# Altium PCB bt.PcbDoc
Units mm, origin at the board's own origin, x right, y up, seen from the top; angles counter-clockwise.
Board outline 40 x 20 mm, 2 copper layers (Top Layer, Bottom Layer); 33 components, 23 nets, 113 pads, 32 vias.
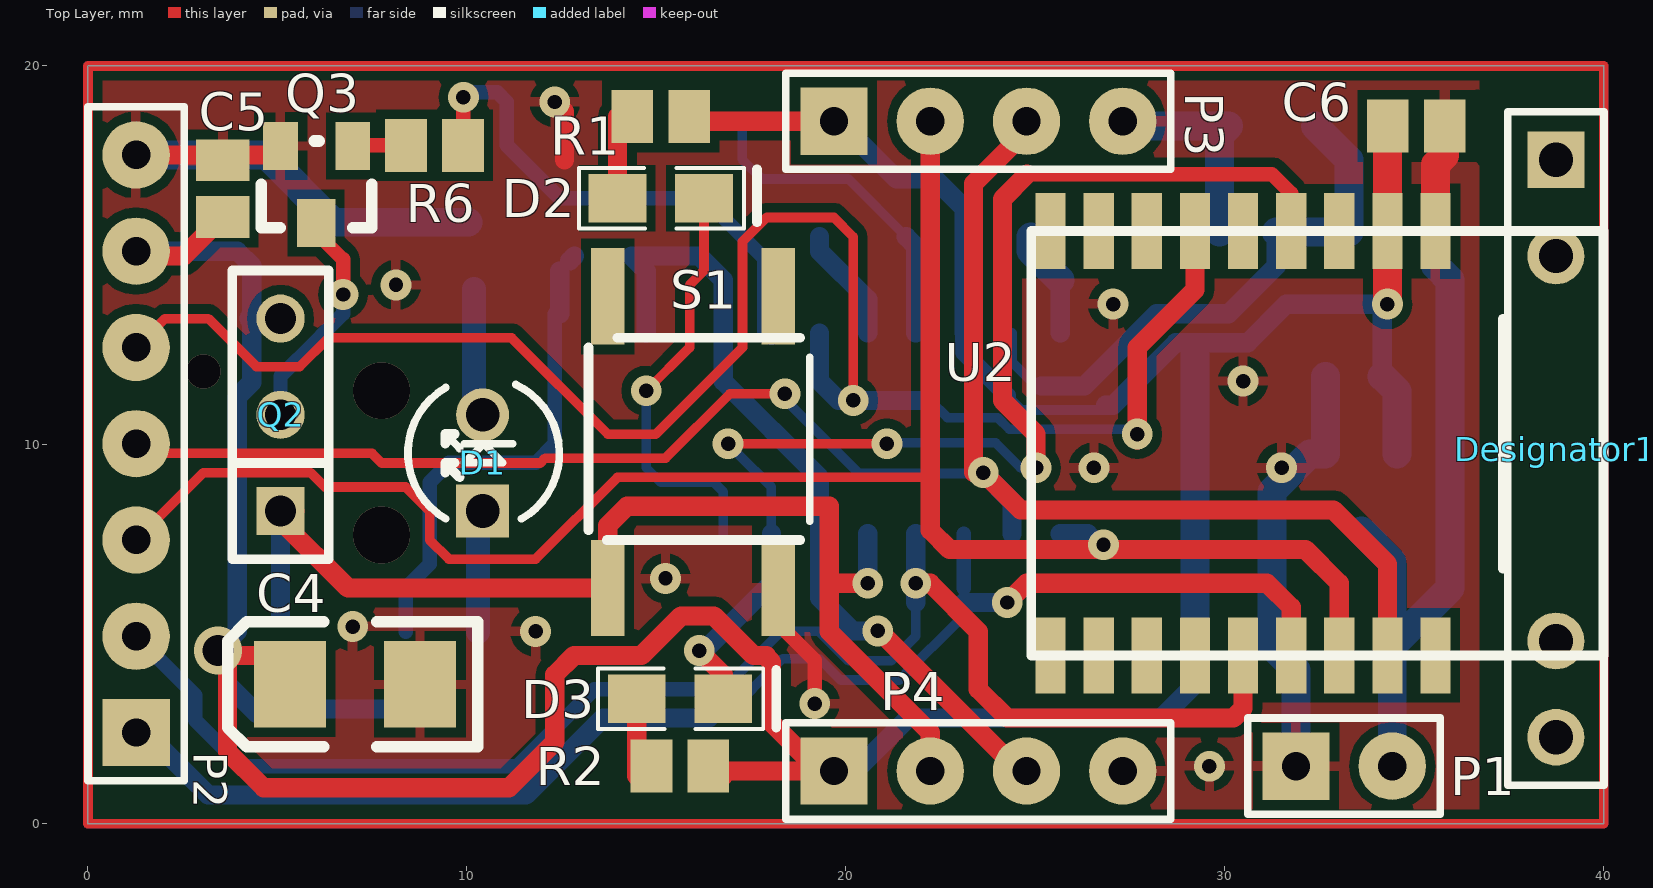
[diagram p0: Top Layer view]
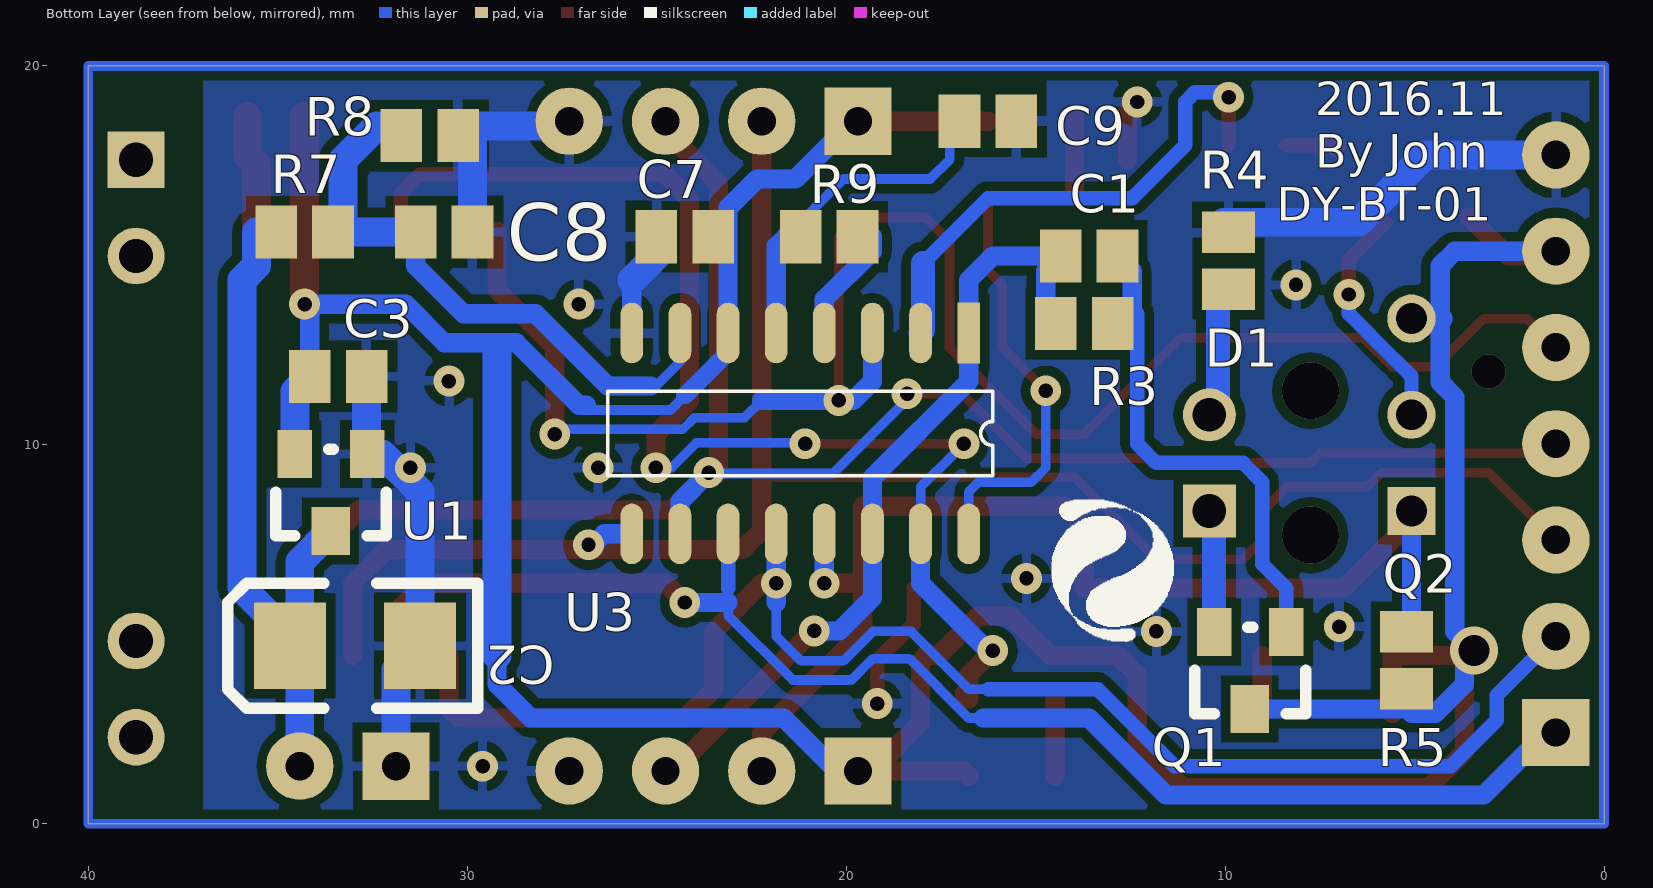
[diagram p1: Bottom Layer view, seen from below]

## Layer stack, top to bottom
Top Solder: solder mask 0.0102, Solder Resist, Dk 3.5
Top Layer: signal copper 0.0356
Dielectric 1: dielectric 0.32, FR-4, Dk 4.8
Bottom Layer: signal copper 0.0356
Bottom Solder: solder mask 0.0102, Solder Resist, Dk 3.5

## Board outline
0,0 40,0 40,20 0,20

## Design rules (kind name [scope] priority, off if disabled: settings)
Clearance [All] p1: gap=0.254
PolygonConnect [All] p1: connectstyle=Relief reliefconductorwidth=0.254 reliefentries=4 polygonreliefangle="90 Angle" airgapwidth=0.254
RoutingVias [All] p1: holewidth=0.381 width=0.813 viastyle="Through Hole" minholewidth=0.254 minwidth=0.762 maxholewidth=0.711 maxwidth=1.27
SolderMaskExpansion [All] p1: expansion=0.102
Width [All] p1: maxlimit=2.54 minlimit=0.254 preferedwidth=0.508 minimp=50.000000 maximp=50.000000 favimp=50.000000
29 further rules are at their usual default settings.

## Components (designator, comment, footprint, x,y, rotation, side; value= is the part's Value field where it differs from the comment)
C1 "Cap Semi" C0805#1 13.589,14.986 r180 bottom
C2 "Cap Pol1" 3528 34.671,4.699 r0 bottom
C3 "Cap Semi" C0805#1 33.401,11.811 r0 bottom
C4 "Cap Pol1" 3528 5.334,3.683 r180 top
C5 "Cap Semi" C0805#1 3.556,16.764 r270 top
C6 "Cap Semi" C0805#1 35.052,18.415 r180 top
C7 "Cap Semi" C0805#1 24.257,15.494 r0 bottom
C8 "Cap Semi" C0805#1 30.607,15.621 r0 bottom
C9 "Cap Semi" C0805#1 16.256,18.542 r180 bottom
D1 "LED0" LED1 10.414,8.255 r90 top locked
D2 "LED0" 0805 13.97,16.51 r0 top
D3 "LED0" 0805 14.478,3.302 r0 top
Designator1 "Comment" HDR1X7#1 38.735,17.526 r270 top
P1 "Header 2" HDR1X2 31.877,1.524 r0 top
P2 "Header 7" HDR1X7#2 1.27,2.413 r90 top
P3 "Header 4" HDR1X4 19.685,18.542 r0 top
P4 "Header 4" HDR1X4 19.685,1.397 r0 top
Q1 "2301" "SOT-23 - LDO" 9.398,3.048 r0 bottom
Q2 "Photo NPN" SIP3 5.08,8.255 r90 top locked
Q3 "2302" "SOT-23 - LDO" 5.969,15.875 r180 top
R1 "Res2" C0805#2 15.113,18.669 r0 top
R2 "Res2" C0805#2 15.621,1.524 r0 top
R3 "Res2" C0805#1 13.716,13.208 r0 bottom
R4 "Res2" C0805#1 9.906,14.859 r270 bottom
R5 "Res2" C0805#1 5.207,4.318 r90 bottom
R6 "Res2" C0805#1 9.144,17.907 r0 top
R7 "Res2" C0805#1 34.29,15.621 r0 bottom
R8 "Res2" C0805#1 30.988,18.161 r180 bottom
R9 "Res2" C0805#1 20.447,15.494 r180 bottom
S1 "SW-PB" KEY4 13.716,6.223 r90 top
U1 "XC6206P302PR" "SOT-23 - LDO" 33.655,7.747 r0 bottom
U2 "BLE 4.0" BLE4.0 25.4,15.621 r270 top
U3 "STC15W201S_SOP16_DIP16" SOP16 16.764,12.954 r270 bottom

## Footprints (in the part's own frame and the unit in brackets; to place one, negate y for a bottom-side part, rotate by r counter-clockwise, add the part's x,y. Pads: shape width x height; smd on the part's side, far side on the other; paste and mask are expansions set on the pad)
0805 [mil]
  rect 60x50 smd: 1(0,0) 2(90,0)
  silkscreen extent -40,-31 131,31
3528 [mil]
  rect 75x90 smd: 1(0,0) 2(-135,0)
  silkscreen extent -195,-65 65,65
BLE4.0 [mm]
  rect 2x0.8 smd: 1(-0.024,10.16) 2(-0.024,8.89) 3(-0.024,7.62) 4(-0.024,6.35) 5(-0.024,5.08) 6(-0.024,3.81) 7(-0.024,2.54) 8(-0.024,1.27) 9(-0.024,0) 10(11.176,0) 11(11.176,1.27) 12(11.176,2.54) 13(11.176,3.81) 14(11.176,5.08) 15(11.176,6.35) 16(11.176,7.62) 17(11.176,8.89) 18(11.176,10.16)
  silkscreen extent -0.02,-0.51 11.18,14.59
C0805#1 [mm] "Chip Capacitor, Body 2.0x1.3mm, IPC High Density"
  rect 1.1x1.4 smd: 1(-0.75,0) 2(0.75,0)
  body extent -1.1,-0.72 1.1,0.72, height 1.4
C0805#2 [mm] "Chip Capacitor, Body 2.0x1.3mm, IPC High Density"
  rect 1.1x1.4 smd: 1(0.75,0) 2(-0.75,0)
  body extent -1.1,-0.72 1.1,0.72, height 1.4
HDR1X2 [mil] "Connector; Header; 2 Position"
  rect 70x70 hole 29.53: 1(0,0)
  round 70 hole 29.53: 2(100,0)
  silkscreen extent -50,-50 150,50
HDR1X4 [mil] "Connector; Header; 4 Position"
  rect 70x70 hole 29.53: 1(0,0)
  round 70 hole 29.53: 2(100,0) 3(200,0) 4(300,0)
  silkscreen extent -50,-50 350,50
HDR1X7#1 [mm] "Connector; Header; 7 Position"
  rect 1.5x1.5 hole 0.9: 1(0,0)
  round 1.5 hole 0.9: 2(2.54,0) 6(12.7,0) 7(15.24,0)
  silkscreen extent -1.27,-1.27 16.51,1.27
HDR1X7#2 [mm] "Connector; Header; 7 Position"
  rect 1.778x1.778 hole 0.75: 1(0,0)
  round 1.778 hole 0.75: 2(2.54,0) 3(5.08,0) 4(7.62,0) 5(10.16,0) 6(12.7,0) 7(15.24,0)
  silkscreen extent -1.27,-1.27 16.51,1.27
KEY4 [mm]
  rect 2.54x0.889 smd: 1(0,-4.5) 2(7.7,-4.5) 3(0,0) 4(7.7,0)
  silkscreen extent 1.27,-5.33 6.6,0.51
LED1 [mil]
  rect 55x55 hole 35: 1(0,0)
  round 55 hole 35: 2(100,0)
  silkscreen extent -8,-80 131,78
SIP3 [mil]
  rect 50x50 hole 32: 1(0,0)
  round 50 hole 32: 2(100,0) 3(200,0)
  silkscreen extent -50,-50 250,50
SOP16 [mm]
  rect 1.6x0.6 smd: 1(0,0)
  oval 1.6x0.6 smd: 2(0,-1.27) 3(0,-2.54) 4(0,-3.81) 5(0,-5.08) 6(0,-6.35) 7(0,-7.62) 8(0,-8.89) 9(5.3,-8.89) 10(5.3,-7.62) 11(5.3,-6.35) 12(5.3,-5.08) 13(5.3,-3.81) 14(5.3,-2.54) 15(5.3,-1.27) 16(5.3,0)
  silkscreen extent 1.53,-9.53 3.77,0.63
"SOT-23 - LDO" [mil]
  rect 36x50 smd: 1(-39.97,-79.46) 2(35.03,-79.46)
  rect 40x50 smd: 3(-1.97,0.54)
  silkscreen extent -60,-84 55,6

## Part data
C1 C3 C5 C6 C7 C8 C9: "Capacitor (Semiconductor SIM Model)"
C2 C4: "Polarized Capacitor (Radial)"
D1 D2 D3: "Typical INFRARED GaAs LED"
P1: "Header, 2-Pin"
P2: "Header, 7-Pin"
P3 P4: "Header, 4-Pin"
Q1: library part MOSFET-P, "P-Channel MOSFET"
Q2: "NPN Phototransistor"
Q3: library part MOSFET-N, "N-Channel MOSFET"
R1 R2 R3 R4 R5 R6 R7 R8 R9: "Resistor"
S1: "Switch"
U1: library part "Volt Reg", "Voltage Regulator"

## Via types
v1: diameter 0.813, hole 0.381, Top Layer to Bottom Layer, 28 vias
v2: diameter 1.5, hole 1.5, Top Layer to Bottom Layer, 2 vias
v3: diameter 0.9, hole 0.9, Top Layer to Bottom Layer, 1 vias
v4: diameter 1.27, hole 0.813, Top Layer to Bottom Layer, 1 vias

## Nets (pads, with @x,y where several pads share a name; then routed paths per layer and width w, separated by ;. In a path a pad name is that pad's centre, name@x,y a point inside that pad or via, vN(x,y) a via of type N, cw(c..) or ccw(c..) an arc to the next point about the centre after c; other vN are vias at no path point)
GND: C2.2 C3.1 C4.2 C5.1 C6.1 C7.2 C8.1 C9.2 P1.1 P2.7 P3.4 P4.4 Q3.2 R4.1 R8.2 S1.1 U1.1 U2.1 U3.8 | length 42.4
  Top Layer w0.254: v1(12.319,19.05) v1@12.573,18.796
  Top Layer w0.381: S1.1 18.216,5.279 19.177,4.318 v1(19.177,3.175)
  Top Layer w0.508: P2.7@1.524,17.653 Q3.2@4.699,17.653 ; C4.2@9.017,2.933 C4.2@9.017,4.445 ; 12.573,17.526 v1@12.573,18.796
  Top Layer w0.762: U2.1 35.56,17.399 35.802,17.641 C6.1@35.802,18.669
  Bottom Layer w0.508: U3.8 25.654,14.351
  Bottom Layer w0.762: P2.7 4.699,17.653 6.477,15.875 R4.1@10.033,15.875 ; C7.2@24.88,15.494 24.88,15.125 25.654,14.351 ; P3.4@27.305,18.669 27.559,18.415 30.099,18.415 29.857,18.173 C8.1 ; P1.1 31.877,4.064 C2.2 31.242,8.763 32.244,9.765 U1.1 32.651,9.776 C3.1
  other v1: 29.591,1.524 11.811,5.08 6.985,5.207 15.24,6.477 26.543,9.398 31.496,9.398 30.48,11.684 27.051,13.716 8.128,14.224
NetC1_1: C1.1 P4.3 R3.2 U3.1 U3.14 | length 21.8
  Top Layer w0.508: v1(20.84,5.092) 20.828,5.103 20.828,5.145 24.576,1.397 P4.3
  Bottom Layer w0.508: R3.2@14.732,12.954 14.732,14.593 C1.1 16.129,14.986 16.764,14.351 U3.1 16.764,11.684 19.304,9.144 U3.14 19.304,5.969 20.181,5.092 v1(20.84,5.092)
NetC1_2: C1.2 Q1.1 R3.1 | length 12.7
  Bottom Layer w0.381: Q1.1 8.383,6.224 9.017,6.858 9.017,9.017 9.525,9.525 11.811,9.525 12.319,10.033 12.319,13.462
  Bottom Layer w0.508: R3.1@12.446,13.462 C1.2@12.446,14.593 ; C1.2@12.711,14.858 C1.2
NetC2_1: C2.1 P1.2 R7.2 U1.3 | length 18.3
  Bottom Layer w0.762: U1.3 34.417,6.921 C2.1@34.417,4.699 ; P1.2 C2.1@34.417,4.699 ; R7.2@35.56,15.621 35.56,14.732 35.941,14.351 35.941,6.223 C2.1@34.417,4.699
NetC8_2: C8.2 R7.1 R8.1 U3.7 | length 15.3
  Bottom Layer w0.254: U3.7 24.384,12.192 25.082,11.493
  Bottom Layer w0.508: 25.146,11.557 26.289,11.557 28.194,13.462 30.099,13.462 31.357,14.72 C8.2
  Bottom Layer w0.762: C8.2 33.274,15.621 33.274,17.526 32.385,18.415
NetC9_1: C9.1 R9.1 U3.5 | length 8.6
  Bottom Layer w0.254: C9.1@17.26,18.288 17.26,17.538 17.78,17.018 20.066,17.018 R9.1@21.59,15.494
  Bottom Layer w0.508: R9.1@21.59,15.494 21.844,15.24 U3.5
NetD1_1: D1.1 Q1.2 | length 3.2
  Bottom Layer w0.635: Q1.2 10.288,8.129 D1.1
NetD1_2: D1.2 R4.2 | length 3.3
  Bottom Layer w0.635: D1.2@10.187,10.797 R4.2@10.187,14.109
NetD2_1: D2.1 R1.2 | length 2
  Top Layer w0.508: D2.1@13.97,16.637 R1.2@13.97,18.669
NetD2_2: D2.2 U3.16 | length 11.1
  Top Layer w0.254: v1(14.732,11.43) 15.875,12.573 15.875,14.224 16.256,14.605 D2.2
  Bottom Layer w0.254: v1(14.732,11.43) 14.732,9.398 15.113,9.017 16.51,9.017 16.764,8.763 U3.16
NetD3_1: D3.1 R2.2 | length 2
  Top Layer w0.508: R2.2@14.478,1.27 D3.1
NetD3_2: D3.2 U2.4 U3.15 | length 33.1
  Top Layer w0.254: v1(16.891,10.033) v1(21.082,10.033)
  Top Layer w0.381: 24.782,17.145 31.242,17.145 31.75,16.637 U2.4
  Top Layer w0.508: v1(16.129,4.572) 16.764,3.937 D3.2 D3.2@16.891,3.429 ; 24.782,17.145 24.13,16.493 24.13,11.176 25.019,10.287 v1(25.019,9.398)
  Bottom Layer w0.254: v1@17.145,9.779 18.034,8.89 U3.15 ; v1@21.082,10.058 23.948,10.058 24.609,9.398 v1(25.019,9.398)
  Bottom Layer w0.508: v1(16.129,4.572) 16.256,4.572 18.034,6.35 U3.15
NetP2_1: P2.1 U2.15 U3.11 | length 37.2
  Top Layer w0.508: v1(24.257,5.842) 24.765,6.35 31.115,6.35 31.75,5.715 U2.15
  Bottom Layer w0.254: 16.383,2.794 16.764,2.794 18.33,4.36 19.297,4.36 19.86,3.796 21.406,3.796 23.114,5.505 23.114,5.842 23.114,6.223
  Bottom Layer w0.381: 23.114,6.223 U3.11
  Bottom Layer w0.508: P2.1@1.524,2.413 3.175,0.762 11.557,0.762 13.589,2.794 16.383,2.794 ; 23.114,5.842 v1(24.257,5.842)
NetP2_2: P2.2 U2.14 U3.12 | length 39.6
  Top Layer w0.508: v1(21.844,6.35) 22.225,6.35 23.495,5.08 23.495,3.556 24.257,2.794 30.226,2.794 30.48,3.048 U2.14
  Bottom Layer w0.254: 16.256,3.556 16.764,3.556 18.288,5.08 19.295,5.08 20.071,4.304 21.195,4.304 21.844,4.953 21.844,5.842
  Bottom Layer w0.381: P2.2 2.832,3.391 2.832,2.734 4.042,1.524 11.331,1.524 13.363,3.556 16.256,3.556
  Bottom Layer w0.508: 21.844,5.842 v1(21.844,6.35) U3.12
NetP2_3: P2.3 P3.2 U2.16 U3.9 | length 49.6
  Top Layer w0.254: P2.3 3.048,9.271 5.873,9.271 6.254,8.89 8.382,8.89 9.017,8.255 9.017,7.493 9.525,6.985 11.811,6.985 13.97,9.144 22.225,9.144
  Top Layer w0.508: P3.2@22.225,18.669 22.225,9.144 22.225,7.747 22.733,7.239 v1@26.797,7.239 ; v1(26.797,7.366) v1@26.797,7.239 ; U2.16 33.02,6.35 32.131,7.239 v1@26.797,7.239
  Bottom Layer w0.508: U3.9 26.382,7.654 26.67,7.366 v1(26.797,7.366)
NetP2_4: P2.4 P3.3 U2.17 U3.10 | length 50.6
  Top Layer w0.254: P2.4 1.524,9.779 7.493,9.779 7.747,9.525 11.938,9.525 12.065,9.652 15.24,9.652 16.94,11.352 v1(18.39,11.352)
  Top Layer w0.508: v1@23.368,9.271 23.368,16.891 24.765,18.288 P3.3@24.765,18.669 ; v1(23.622,9.271) 24.613,8.28 32.868,8.28 34.29,6.858 U2.17
  Bottom Layer w0.254: P2.4 P2.4@1.524,9.779 ; v1(18.39,11.352) 18.39,11.201 20.345,9.246 23.597,9.246 v1(23.622,9.271)
  Bottom Layer w0.508: v1(23.622,9.271) 24.384,8.509 U3.10
NetP2_5: P2.5 U2.6 U3.3 | length 46.1
  Top Layer w0.254: P2.5 2.032,13.335 3.175,13.335 4.445,12.065 5.588,12.065 6.35,12.827 11.176,12.827 13.716,10.287 14.986,10.287 17.272,12.573 17.272,15.367 17.907,16.002 19.685,16.002 20.193,15.494 v1(20.193,11.176)
  Top Layer w0.508: v1@27.686,10.135 27.686,12.573 29.21,14.097 U2.6
  Bottom Layer w0.254: v1@19.812,11.176 v1(20.193,11.176) ; 22.225,11.176 22.679,10.722 24.003,10.722 24.311,10.414 27.407,10.414 v1@27.686,10.135
  Bottom Layer w0.508: U3.3 19.304,11.684 v1@19.812,11.176 ; v1(20.193,11.176) 22.225,11.176
  other v1: 27.686,10.287
NetP4_2: P4.2 Q2.1 R5.2 S1.3 U3.13 | length 31
  Top Layer w0.508: Q2.1@5.461,8.255 Q2.1 5.08,8.001 6.858,6.223 S1.3 13.716,7.874 14.224,8.382 19.558,8.382 19.558,6.477 ; v1(20.574,6.35) 19.685,6.35 19.558,6.477 ; P4.2 22.225,2.413 19.558,5.08 19.558,6.477
  Bottom Layer w0.508: R5.2@5.08,5.461 Q2.1 ; v1(20.574,6.35) U3.13
NetQ2_2: Q2.2 Q3.3 | length 6.2
  Top Layer w0.381: Q3.3@5.765,15.861 6.731,14.895 v1(6.731,13.97)
  Bottom Layer w0.381: Q2.2 5.08,11.811 5.524,12.255 5.527,12.255 6.731,13.459 v1(6.731,13.97)
NetQ3_1: Q3.1 R6.1 | length 1.6
  Top Layer w0.381: Q3.1@7.097,17.78 Q3.1 6.998,17.907 R6.1
NetR6_2: R6.2 U3.2 | length 13.9
  Top Layer w0.381: R6.2@9.906,17.919 v1@9.906,19.304
  Bottom Layer w0.381: v1@9.906,19.304 10.795,19.304 11.049,19.05 11.049,17.907 12.446,16.51 16.256,16.51 17.97,14.795
  Bottom Layer w0.635: 17.97,14.795 17.97,13.018 U3.2
  other v1: 9.906,19.177
NetR9_2: R9.2 U3.4 | length 3.1
  Bottom Layer w0.508: R9.2@19.304,15.494 19.304,15.113 20.574,13.843 U3.4
V30: C3.2 C4.1 C5.2 C6.2 C7.1 P2.6 P3.1 P4.1 Q1.3 Q2.3 R1.1 R2.1 R5.1 U1.2 U2.2 U3.6 | length 107.6
  Top Layer w0.508: P2.6 1.397,14.986 2.528,14.986 C5.2 ; C4.1@5.588,2.921 5.588,4.445 3.683,4.445 3.683,1.905 4.637,0.951 11.111,0.951 12.319,2.159 12.319,3.937 12.827,4.445 14.605,4.445 15.646,5.486 16.52,5.486 17.561,4.445 17.907,4.445 17.907,4.401 18.034,4.274 18.034,2.667 P4.1@19.304,1.397 ; R1.1@16.256,18.542 19.558,18.542 P3.1@19.685,18.669 ; R2.1@16.764,1.27 16.891,1.397 P4.1@19.304,1.397 ; P4.1 P4.1@19.304,1.397
  Top Layer w0.762: v1(34.29,13.716) U2.2 34.29,18.657 C6.2@34.302,18.669
  Bottom Layer w0.254: 24.257,11.303 24.638,10.922 26.859,10.922
  Bottom Layer w0.457: U3.6 23.114,12.446 24.257,11.303
  Bottom Layer w0.508: P2.6 3.048,15.113 3.937,15.113 4.318,14.732 4.318,13.335 4.318,11.649 3.937,11.268 3.937,5.08 v4@3.683,4.826 ; v4(3.429,4.572) v4@3.683,4.826 ; 5.08,2.921 4.445,2.921 3.683,3.683 v4@3.683,4.826 ; R5.1@5.193,3.034 Q1.3 ; P4.1 20.249,1.397 21.646,2.794 28.321,2.794 29.21,3.683 29.21,4.445 ; P3.1@19.685,18.669 21.336,17.018 22.352,17.018 23.114,16.256 U3.6 ; 26.859,11.049 27.051,11.049 28.702,12.7 30.607,12.7 31.623,13.716 v1(34.29,13.716) ; C3.2 v1@34.151,13.474
  Bottom Layer w0.635: 4.318,13.335 Q2.3
  Bottom Layer w0.762: 29.21,4.445 29.21,12.573 ; C3.2 34.545,11.417 U1.2
pads on no net: Designator1.1 Designator1.2 Designator1.6 Designator1.7 S1.2 S1.4 U2.3 U2.5 U2.7 U2.8 U2.9 U2.10 U2.11 U2.12 U2.13 U2.18
copper on no net:
  other v2: 7.747,7.62 7.747,11.43
  other v3: 3.048,11.938

## Polygon pours and split planes (outlines as drawn)
GND on Bottom Layer "Bottom Layer-No Net" (solid, remove dead copper, pour order 2): 0,20.047 36.957,20.047 36.957,0.047 0,0.047 0,20.047
GND on Top Layer "Bottom Layer-No Net" (solid, remove dead copper, pour order 4): -0.113,19.926 36.656,19.926 36.717,19.865 36.717,-0.074 -0.113,-0.074 -0.113,19.926

## Other copper
Multi-Layer:
  the board outline again, w0.254

## Silkscreen, mask and mechanical layers (free items; w line width, h text height)
Top Overlay:
  lines w0.254: 17.653,15.875 17.653,17.272 ; 18.161,2.54 18.161,4.064
Bottom Overlay:
  drawing of 280 lines, arcs and shapes, not listed
  text "2016.11" at 7.62,18.415 h1.52
  text "By John" at 7.62,17.018 h1.52
  text "DY-BT-01" at 8.636,15.621 h1.52
Mechanical 1:
  lines w0.254: 37.465,0.889 37.465,19.431 ; 0,20 40,20 40,0 ; 0,20 0,20 ; 0,20 0,0 40,0 ; 40,0 40,0